# Altium PCB PCBInputPowerver2.PcbDoc
Units mm, origin at the board's own origin, x right, y up, seen from the top; angles counter-clockwise.
Board outline 75 x 90 mm, 2 copper layers (Top Layer, Bottom Layer), stack 1.671 mm thick; 51 components, 58 nets, 142 pads, 0 vias.
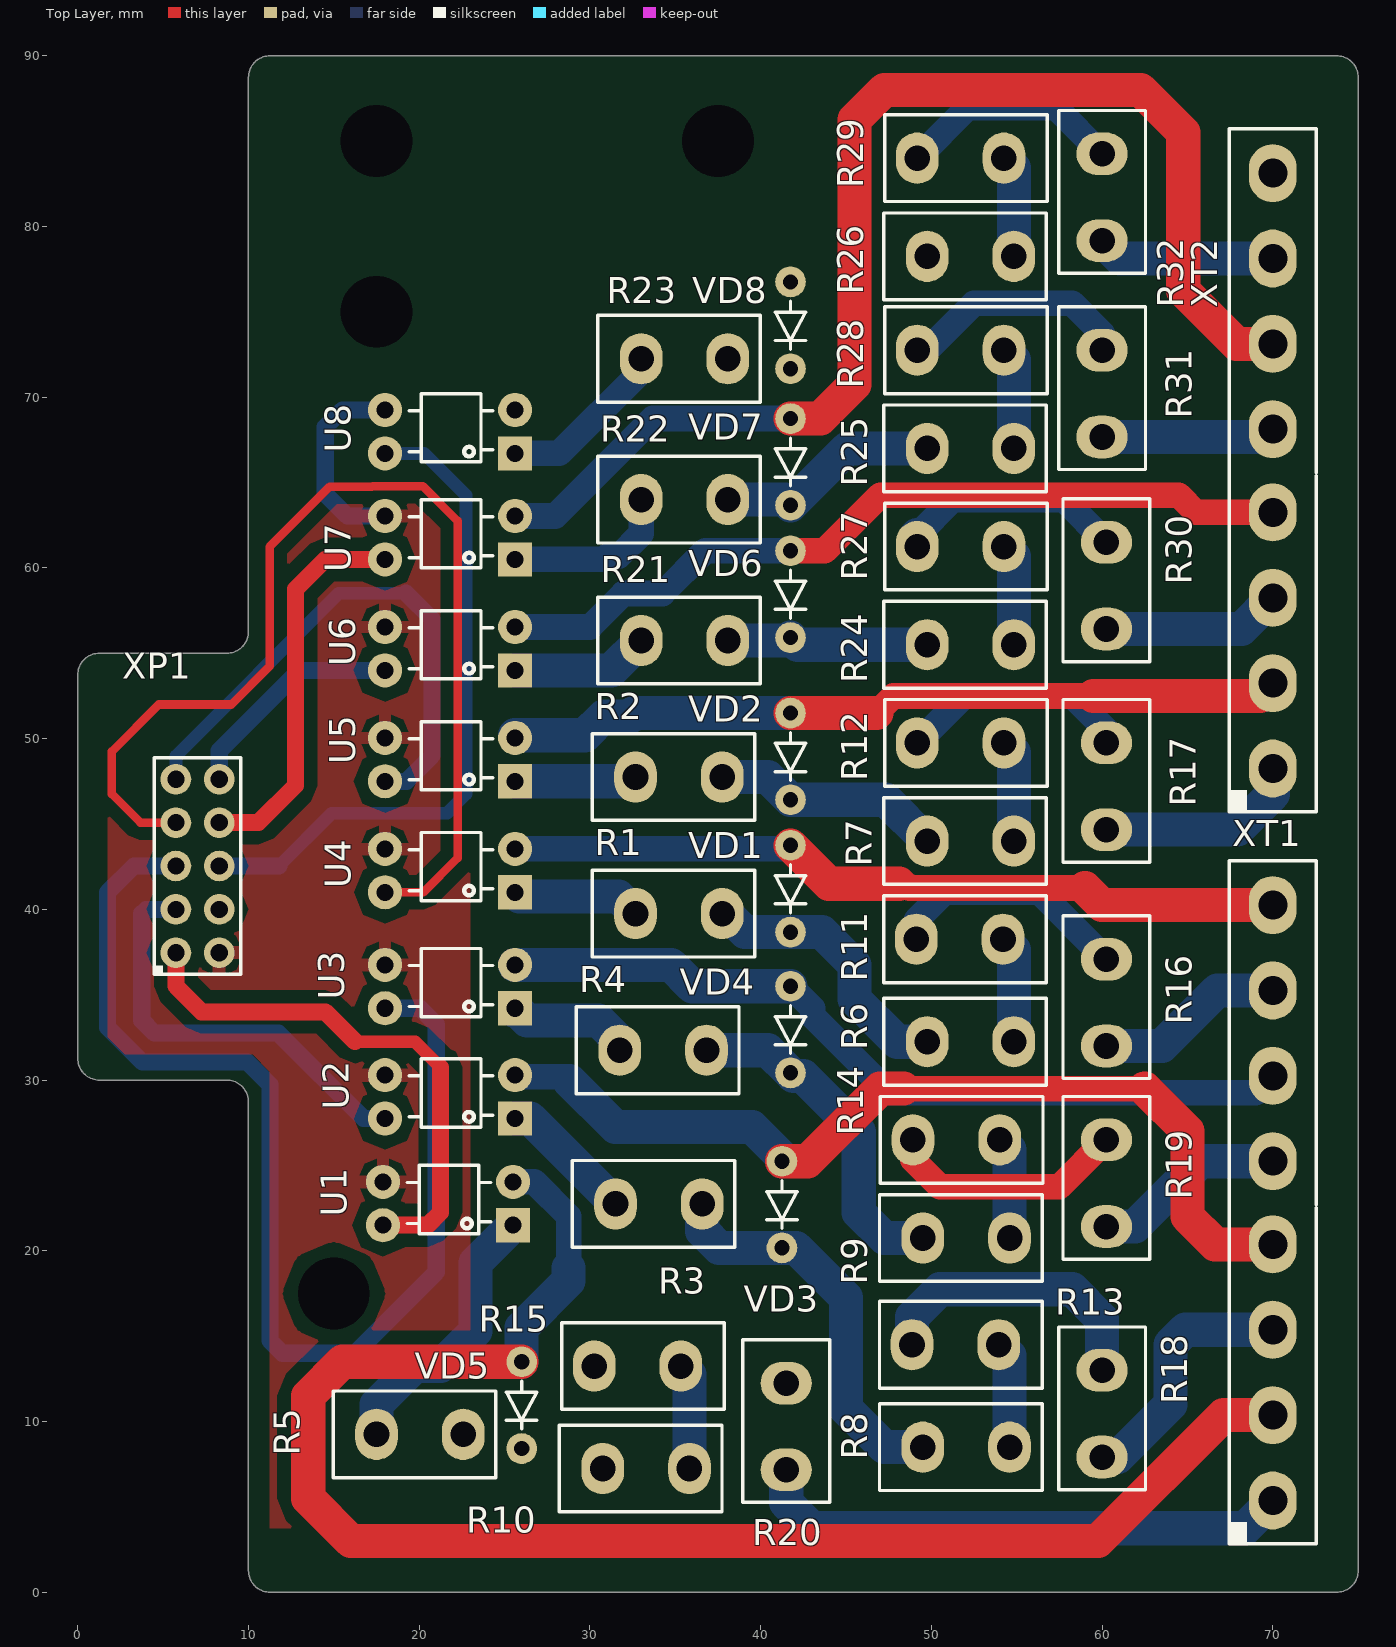
[diagram p0: Top Layer view]
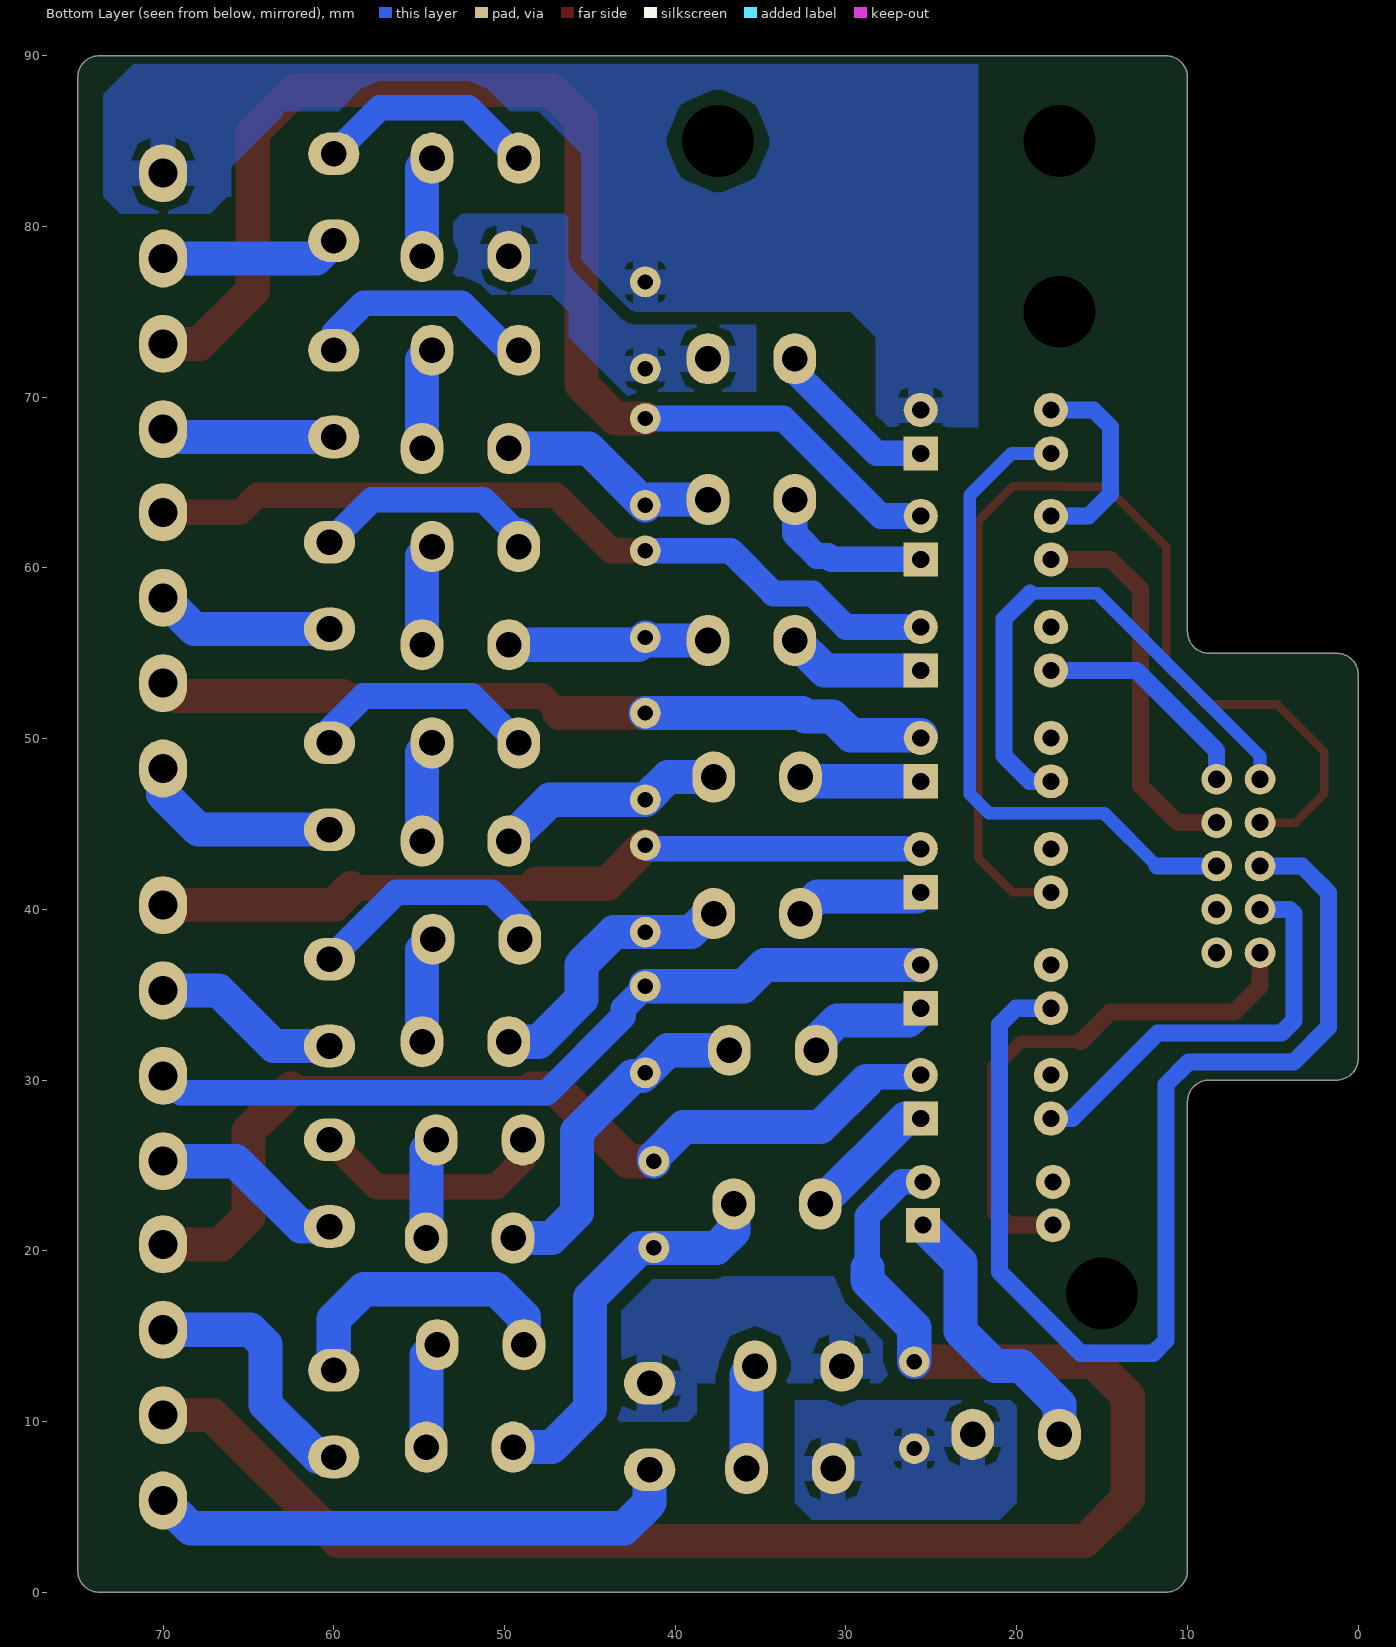
[diagram p1: Bottom Layer view, seen from below]

## Layer stack, top to bottom
Top Solder: solder mask 0.0102, Solder Resist, Dk 3.5
Top Layer: signal copper 0.0356
Dielectric 1: dielectric 1.6, FR-4, Dk 4.8
Bottom Layer: signal copper 0.0356
Bottom Solder: solder mask 0.0102, Solder Resist, Dk 3.5

## Board outline
2.5,30 8.73,30 cw(c8.73,28.73) 10,28.73 10,1.27 ccw(c11.27,1.27) 11.27,0 73.73,0 ccw(c73.73,1.27) 75,1.27 75,88.73 ccw(c73.73,88.73) 73.73,90 11.27,90 ccw(c11.27,88.73) 10,88.73 10,56.27 cw(c8.73,56.27) 8.73,55 1.27,55 ccw(c1.27,53.73) 0,53.73 0,31.27 ccw(c1.27,31.27) 1.27,30

## Design rules (kind name [scope] priority, off if disabled: settings)
Clearance [All] p1: gap=0.7 ignorepadtopadclearanceinfootprint=FALSE except(0.5: Arc-THPad Track-THPad SMDPad-THPad THPad-THPad)
PlaneClearance PlaneClearance_1 [InNetClass('Power')] p1: clearance=2
PlaneClearance [InNetClass('control_circuit')] p2: clearance=0.7
PlaneConnect PlaneConnect_1 [InNetClass('Power')] p1: planeconnectstyle=Relief reliefexpansion=0.8 reliefentries=4 reliefconductorwidth=1 reliefairgap=0.5
PlaneConnect [InNetClass('control_circuit')] p2: planeconnectstyle=Relief reliefexpansion=0.5 reliefentries=4 reliefconductorwidth=0.6 reliefairgap=0.4
PolygonConnect PolygonConnect_1 [InNetClass('Power')] p1: connectstyle=Relief reliefconductorwidth=1.5 reliefentries=4 polygonreliefangle="90 Angle" airgapwidth=0.5
PolygonConnect [InNetClass('control_circuit')] p2: connectstyle=Relief reliefconductorwidth=0.75 reliefentries=4 polygonreliefangle="90 Angle" airgapwidth=0.4
RoutingVias [All] p1: holewidth=0.8 width=1.6 viastyle="Through Hole" minholewidth=0.8 minwidth=1.6 maxholewidth=0.8 maxwidth=1.6
SolderMaskExpansion [All] p1: expansion=0.102
Width Width_1 [InNetClass('Power')] p1: maxlimit=3 minlimit=1.5 preferedwidth=2
Width [InNetClass('control_circuit')] p2: maxlimit=2 minlimit=0.4 preferedwidth=1
28 further rules are at their usual default settings.

## Classes and differential pairs
net class Power: NetR1_1 NetR1_2 NetR2_1 NetR2_2 NetR3_1 NetR3_2 NetR4_1 NetR4_2 NetR5_1 NetR5_2 NetR6_2 NetR7_2 NetR8_2 NetR9_2 NetR10_2 NetR11_2 NetR12_2 NetR13_2 NetR14_2 NetR15_2 NetR21_1 NetR21_2 NetR22_1 NetR22_2 NetR23_1 NetR23_2 NetR24_2 NetR25_2 NetR26_2 NetR27_2 NetR28_2 NetR29_2 SW1_1 SW1_2 SW2_1 SW2_2 SW3_1 SW3_2 SW4_1 SW4_2 SW5_1 SW5_2 SW6_1 SW6_2 SW7_1 SW7_2 SW8_1 SW8_2
net class control_circuit: GND INPUT1 INPUT2 INPUT3 INPUT4 INPUT5 INPUT6 INPUT7 INPUT8 VCC

## Components (designator, comment, footprint, x,y, rotation, side; value= is the part's Value field where it differs from the comment)
R1 "CFR02WJ0151P5" MOF-2W-15x5 32.67,39.75 r0 top value=150
R2 "CFR02WJ0151P5" MOF-2W-15x5 32.67,47.75 r0 top value=150
R3 "CFR02WJ0151P5" MOF-2W-15x5 31.5,22.75 r0 top value=150
R4 "CFR02WJ0151P5" MOF-2W-15x5 31.75,31.75 r0 top value=150
R5 "CFR02WJ0151P5" MOF-2W-15x5 17.5,9.25 r0 top value=150
R6 "CFR02WJ0512P5" MOF-2W-15x5 49.75,32.25 r0 top value=5k1
R7 "CFR02WJ0512P5" MOF-2W-15x5 49.75,44 r0 top value=5k1
R8 "CFR02WJ0512P5" MOF-2W-15x5 49.5,8.5 r0 top value=5k1
R9 "CFR02WJ0512P5" MOF-2W-15x5 49.5,20.75 r0 top value=5k1
R10 "CFR02WJ0512P5" MOF-2W-15x5 30.75,7.25 r0 top value=5k1
R11 "CFR02WJ0512P5" MOF-2W-15x5 54.195,38.25 r180 top value=5k1
R12 "CFR02WJ0512P5" MOF-2W-15x5 54.25,49.75 r180 top value=5k1
R13 "CFR02WJ0512P5" MOF-2W-15x5 53.945,14.5 r180 top value=5k1
R14 "CFR02WJ0512P5" MOF-2W-15x5 54,26.5 r180 top value=5k1
R15 "CFR02WJ0512P5" MOF-2W-15x5 35.33,13.25 r180 top value=5k1
R16 "CFR02WJ0512P5" MOF-2W-15x5 60.25,37.08 r270 top value=5k1
R17 "CFR02WJ0512P5" MOF-2W-15x5 60.25,49.75 r270 top value=5k1
R18 "CFR02WJ0512P5" MOF-2W-15x5 60,13 r270 top value=5k1
R19 "CFR02WJ0512P5" MOF-2W-15x5 60.25,26.5 r270 top value=5k1
R20 "CFR02WJ0512P5" MOF-2W-15x5 41.5,12.25 r270 top value=5k1
R21 "CFR02WJ0151P5" MOF-2W-15x5 33,55.75 r0 top value=150
R22 "CFR02WJ0151P5" MOF-2W-15x5 33,64 r0 top value=150
R23 "CFR02WJ0151P5" MOF-2W-15x5 33,72.25 r0 top value=150
R24 "CFR02WJ0512P5" MOF-2W-15x5 49.75,55.5 r0 top value=5k1
R25 "CFR02WJ0512P5" MOF-2W-15x5 49.75,67 r0 top value=5k1
R26 "CFR02WJ0512P5" MOF-2W-15x5 49.75,78.25 r0 top value=5k1
R27 "CFR02WJ0512P5" MOF-2W-15x5 54.25,61.25 r180 top value=5k1
R28 "CFR02WJ0512P5" MOF-2W-15x5 54.25,72.75 r180 top value=5k1
R29 "CFR02WJ0512P5" MOF-2W-15x5 54.25,84 r180 top value=5k1
R30 "CFR02WJ0512P5" MOF-2W-15x5 60.25,61.5 r270 top value=5k1
R31 "CFR02WJ0512P5" MOF-2W-15x5 60,72.75 r270 top value=5k1
R32 "CFR02WJ0512P5" MOF-2W-15x5 60,84.25 r270 top value=5k1
U1 "PC817C" DIP-4M 25.5,21.5 r180 top
U2 "PC817C" DIP-4M 25.62,27.75 r180 top
U3 "PC817C" DIP-4M 25.62,34.21 r180 top
U4 "PC817C" DIP-4M 25.62,41 r180 top
U5 "PC817C" DIP-4M 25.62,47.5 r180 top
U6 "PC817C" DIP-4M 25.62,54 r180 top
U7 "PC817C" DIP-4M 25.62,60.5 r180 top
U8 "PC817C" DIP-4M 25.62,66.71 r180 top
VD1 "BZX55C3V3" DO-35 41.75,43.75 r270 top
VD2 "BZX55C3V3" DO-35 41.75,51.5 r270 top
VD3 "BZX55C3V3" DO-35 41.25,25.25 r270 top
VD4 "BZX55C3V3" DO-35 41.75,35.5 r270 top
VD5 "BZX55C3V3" DO-35 26,13.5 r270 top
VD6 "BZX55C3V3" DO-35 41.75,61 r270 top
VD7 "BZX55C3V3" DO-35 41.75,68.75 r270 top
VD8 "BZX55C3V3" DO-35 41.75,76.75 r270 top
XP1 "IDC BH-10" IDC-10-2 5.75,37.46 r90 top
XT1 "KLS2-EDGK-500-08P-4C" KLS2-EDR-500-8P 70,5.377 r90 top
XT2 "KLS2-EDGK-500-08P-4C" KLS2-EDR-500-8P 70,48.25 r90 top

## Footprints (in the part's own frame and the unit in brackets; to place one, negate y for a bottom-side part, rotate by r counter-clockwise, add the part's x,y. Pads: shape width x height; smd on the part's side, far side on the other; paste and mask are expansions set on the pad)
DIP-4M [mm]
  rect 2x2 hole 1: 1(0,0)
  round 2 hole 1: 2(0,-2.54) 3(7.62,-2.54) 4(7.62,0)
  silkscreen extent 1.3,-3.5 6.2,0.5, body extent -0.19,-4.04 7.81,1.5, height 4.31
DO-35 [mm]
  round 1.8 hole 0.9: 1(0,0) 2(5.08,0)
  silkscreen extent 1.14,-0.89 3.94,0.89, body extent -0.28,-0.9 5.35,0.9, height 1.82
IDC-10-2 [mm]
  round 1.8 hole 1: 1(0,0) 2(2.54,0) 3(5.08,0) 4(7.62,0) 5(10.16,0) 6(10.16,-2.54) 7(7.62,-2.54) 8(5.08,-2.54) 9(2.54,-2.54) 10(0,-2.54)
  silkscreen extent -1.27,-3.81 11.43,1.27, body extent -5.13,-6.22 15.27,3.13, height 10.25
KLS2-EDR-500-8P [mm]
  oval 3.4x2.8 hole 1.7: 1(0,0) 2(5,0) 3(10,0) 4(15,0) 5(19.873,0) 6(24.873,0) 7(29.873,0) 8(34.873,0)
  silkscreen extent -2.54,-2.54 37.46,2.54, body extent -2.41,-20.69 37.46,1.65, height 16.34
MOF-2W-15x5 [mm]
  oval 2.5x3 hole 1.5: 1(0,0) 2(5.08,0)
  silkscreen extent -2.54,-2.54 6.98,2.54, body extent -2.6,-2.6 5.4,2.6, height 23.6

## Part data
R1 R2 R3 R4 R5 R6 R7 R8 R9 R10 R11 R12 R13 R14 R15 R16 R17 R18 R19 R20 R21 R22 R23 R24 R25 R26 R27 R28 R29 R30 R31 R32: library part Resistor, Manufacturer="Royal Ohm", Package=AXELPackage, Power=2W, Price=0.05, Quntity=24
  R1 R2 R3 R4 R5 R21 R22 R23: Part Number=CFR02WJ0151P5, ShoppingPlace=http://belchip.by/product/?selected_product=08041
  R6 R7 R8 R9 R10 R11 R12 R13 R14 R15 R16 R17 R18 R19 R20 R24 R25 R26 R27 R28 R29 R30 R31 R32: Part Number=CFR02WJ0512P5, ShoppingPlace=http://belchip.by/product/?selected_product=05907
U1 U2 U3 U4 U5 U6 U7 U8: library part PC817, Manufacturer=SHARP, Package=DIP-4, Part Number=PC817C, Price=0.15, Quantity=8, ShoppingPlace=http://belchip.by/product/?selected_product=29779
VD1 VD2 VD3 VD4 VD5 VD6 VD7 VD8: library part Stabilitron, Manufacturer="DC Components", Package=DO-35, Part Number=BZX55C3V3, Price=0.025, Quantity=16, ShoppingPlace=http://belchip.by/product/?selected_product=01814
XP1: library part "Разъем IDC BH-10", Manufacturer=RUICHI, Part Number="IDC BH-10", Price=0.22, Quantity=1, ShoppingPlace=http://belchip.by/product/?selected_product=01919
XT1 XT2: Manufacturer=KLS, Part Number=KLS2-EDGK-500-08P-4C, Price=0.55, Quantity=2, ShoppingPlace=http://belchip.by/product/?selected_product=19113

## Free pads (board coordinates)
  round 0 hole 4.2: 0(15,17.5) 0(17.5,75) 0(17.5,85) 0(37.5,85)

## Nets (pads, with @x,y where several pads share a name; then routed paths per layer and width w, separated by ;. In a path a pad name is that pad's centre, name@x,y a point inside that pad or via, vN(x,y) a via of type N, cw(c..) or ccw(c..) an arc to the next point about the centre after c; other vN are vias at no path point)
GND: U1.3 U2.3 U3.3 U4.3 U5.3 U6.3 U7.3 U8.3 XP1.10 | length 11.9
  Bottom Layer w1: U7.3 15.79,63.04 14.5,64.33 14.5,68.25 15.5,69.25 U8.3
INPUT1: U1.4 XP1.1 | length 31.6
  Top Layer w0.75: 16.25,32.25 19.75,32.25 21.25,30.75
  Top Layer w1: XP1.1 5.75,35.5 7.25,34 14.5,34 16.25,32.25 ; U1.4 20.5,21.5 21.25,22.25 21.25,30.75
INPUT2: U2.4 XP1.2 | length 25
  Bottom Layer w1: XP1.2 4,40 3.75,39.75 3.75,33.5 4.5,32.75 11.75,32.75 16.75,27.75 U2.4
INPUT3: U3.4 XP1.3 | length 68.4
  Bottom Layer w1: XP1.3 3.29,42.54 1.75,41 1.75,33.096 3.796,31.05 9.95,31.05 11.25,29.75 11.25,14.75 12,14 16.25,14 21,18.75 21,33.25 20.04,34.21 U3.4
INPUT4: U4.4 XP1.4 | length 63.4
  Top Layer w0.5: XP1.4 3.67,45.08 2,46.75 2,49.25 4.75,52 9,52 11.25,54.25 11.25,61.25 14.75,64.75 17.235,64.75 17.275,64.79 20.21,64.79 22.25,62.75 22.25,43 20.25,41 U4.4
INPUT5: U5.4 XP1.5 | length 32.3
  Bottom Layer w0.75: XP1.5 5.75,48.977 15.293,58.52 19.23,58.52
  Bottom Layer w1: U5.4 19.25,47.5 20.75,49 20.75,57 19.23,58.52
INPUT6: U6.4 XP1.6 | length 13.3
  Bottom Layer w1: XP1.6 8.29,49.29 13,54 U6.4
INPUT7: U7.4 XP1.7 | length 22.8
  Top Layer w1: XP1.7 10.58,45.08 12.75,47.25 12.75,58.75 14.5,60.5 U7.4
INPUT8: U8.4 XP1.8 | length 39.5
  Bottom Layer w0.75: 11.79,42.54 14.875,45.625 21.625,45.625 22.75,46.75 22.75,64.25 20.29,66.71 U8.4
  Bottom Layer w1: XP1.8 11.79,42.54
NetR1_1: R1.1 U4.1 | length 7.6
  Bottom Layer w2: U4.1 25.87,40.75 31.67,40.75 R1.1
NetR1_2: R1.2 R6.1 VD1.2 | length 16.3
  Bottom Layer w2: R1.2 38,39.75 39.08,38.67 VD1.2 43.58,38.67 45.5,36.75 45.5,34.75 48,32.25 R6.1
NetR2_1: R2.1 U5.1 | length 7.2
  Bottom Layer w2: U5.1 32.42,47.5 R2.1
NetR2_2: R2.2 R7.1 VD2.2 | length 13.6
  Bottom Layer w2: R2.2 40.42,47.75 VD2.2 47.33,46.42 R7.1
NetR3_1: R3.1 U2.1 | length 8
  Bottom Layer w2: U2.1 26.5,27.75 R3.1
NetR3_2: R3.2 R8.1 VD3.2 | length 23.6
  Bottom Layer w2: R3.2 36.58,21.17 37.58,20.17 VD3.2 42.08,20.17 45,17.25 45,10.75 47.25,8.5 R8.1
NetR4_1: R4.1 U3.1 | length 7.4
  Bottom Layer w2: U3.1@25.62,34.05 25.78,34.05 26.33,33.5 30.5,33.5 31.75,32.25 R4.1
NetR4_2: R4.2 R9.1 VD4.2 | length 20
  Bottom Layer w2: R4.2 40.42,31.75 VD4.2 41.94,30.23 42.494,30.23 45.75,26.974 45.75,22.25 47.25,20.75 R9.1
NetR5_1: R5.1 U1.1 | length 16.4
  Bottom Layer w2: R5.1 17.5,11 19.75,13.25 21.25,13.25 23.3,15.3 23.3,19.3 U1.1
NetR5_2: R5.2 R10.1 VD5.2
NetR6_2: R6.2 R11.1 | length 6.3
  Bottom Layer w2: R11.1 54.83,37.615 R6.2
NetR7_2: R7.2 R12.1 | length 6
  Bottom Layer w2: R12.1 54.83,49.17 R7.2
NetR8_2: R8.2 R13.1 | length 6.3
  Bottom Layer w2: R13.1 54.58,13.865 R8.2
NetR9_2: R9.2 R14.1 | length 6
  Bottom Layer w2: R14.1 54.58,25.92 R9.2
NetR10_2: R10.2 R15.1 | length 6.2
  Bottom Layer w2: R15.1 35.83,12.75 R10.2
NetR11_2: R11.2 R16.1 | length 14.6
  Bottom Layer w1.5: R11.2 49.115,39.365 50.75,41 56.33,41 R16.1
NetR12_2: R12.2 R17.1 | length 13.8
  Bottom Layer w1.5: R12.2 51.92,52.5 58.25,52.5 60.25,50.5 R17.1
NetR13_2: R13.2 R18.1 | length 17.2
  Bottom Layer w2: R13.2 48.865,16.115 50.5,17.75 58.25,17.75 60,16 R18.1
NetR14_2: R14.2 R19.1 | length 14.3
  Top Layer w1.5: R14.2 48.92,25.33 50.5,23.75 57.5,23.75 R19.1
NetR15_2: R15.2 R20.1
NetR21_1: R21.1 U6.1 | length 8.1
  Bottom Layer w2: U6.1 31.25,54 R21.1
NetR21_2: R21.2 R24.1 VD6.2 | length 11.9
  Bottom Layer w2: R21.2 41.58,55.75 VD6.2 42.17,55.5 R24.1
NetR22_1: R22.1 U7.1 | length 10
  Bottom Layer w1.5: U7.1 30.853,60.5 31.053,60.7 31.7,60.7 33,62 R22.1
NetR22_2: R22.2 R25.1 VD7.2 | length 13.2
  Bottom Layer w2: R22.2 41.42,64 VD7.2 45.08,67 R25.1
NetR23_1: R23.1 U8.1 | length 10.1
  Bottom Layer w1.5: U8.1 28.21,66.71 33,71.5 R23.1
NetR23_2: R23.2 R26.1 VD8.2
NetR24_2: R24.2 R27.1 | length 6
  Bottom Layer w2: R27.1 54.83,60.67 R24.2
NetR25_2: R25.2 R28.1 | length 6
  Bottom Layer w2: R28.1 54.83,72.17 R25.2
NetR26_2: R26.2 R29.1 | length 6
  Bottom Layer w2: R29.1 54.83,83.42 R26.2
NetR27_2: R27.2 R30.1 | length 13.6
  Bottom Layer w1.5: R27.2@49.17,61.92 51.25,64 57.75,64 R30.1
  Bottom Layer w2: R27.2 R27.2@49.17,61.92
NetR28_2: R28.2 R31.1 | length 13.7
  Bottom Layer w1.5: R28.2 49.75,72.75 52.5,75.5 58.25,75.5 60,73.75 R31.1
NetR29_2: R29.2 R32.1 | length 13.2
  Bottom Layer w1.5: R29.2 52.12,86.95 57.3,86.95 R32.1
SW1_1: R20.2 XT1.1 | length 31.7
  Bottom Layer w2: R20.2 41.5,5.25 43,3.75 68.373,3.75 XT1.1
SW1_2: U1.2 VD5.1 XT1.2 | length 93.7
  Top Layer w2: VD5.1 15.5,13.5 13.5,11.5 13.5,5.5 16,3 59.75,3 67.127,10.377 XT1.2
  Bottom Layer w1.5: U1.2 26.745,24.04 28.75,22.035 28.75,19
  Bottom Layer w2: VD5.1 26,15.5 28.75,18.25 28.75,19
SW2_1: R18.2 XT1.3 | length 15.1
  Bottom Layer w2: R18.2 60.92,7.92 64,11 64,14.5 64.877,15.377 XT1.3
SW2_2: U2.2 VD3.1 XT1.4 | length 55
  Top Layer w1.5: 48.361,29.5 62.5,29.5
  Top Layer w2: VD3.1 42.75,25.25 47,29.5 48.361,29.5 ; 62.5,29.5 65,27 65,22 66.623,20.377 XT1.4
  Bottom Layer w1.5: U2.2 25.71,30.2 28.816,30.2
  Bottom Layer w2: 28.816,29.934 31.5,27.25 39.5,27.25 41.25,25.5 VD3.1
SW3_1: R19.2 XT1.5 | length 11.3
  Bottom Layer w2: R19.2 61.92,21.42 65.75,25.25 XT1.5
SW3_2: U3.2 VD4.1 XT1.6 | length 48.2
  Bottom Layer w1.5: VD4.1 43.05,34.2 43.05,33.735 47.535,29.25 69,29.25 XT1.6
  Bottom Layer w2: U3.2 34.75,36.75 36,35.5 VD4.1
SW4_1: R16.2 XT1.7 | length 11.1
  Bottom Layer w2: R16.2 63.5,32 66.75,35.25 XT1.7
SW4_2: U4.2 VD1.1 XT1.8 | length 45.9
  Top Layer w1.5: 48.111,41.5 48.464,41.5 48.714,41.25 59,41.25
  Top Layer w2: VD1.1 44,41.5 48.111,41.5 ; 59,41.25 60,40.25 XT1.8
  Bottom Layer w1.5: U4.2 41.54,43.54 VD1.1
SW5_1: R17.2 XT2.1 | length 12.1
  Bottom Layer w2: R17.2 67.92,44.67 70,46.75 XT2.1
SW5_2: U5.2 VD2.1 XT2.2 | length 45.6
  Top Layer w1.5: 46.781,51.5 47.781,52.5 59.5,52.5
  Top Layer w2: VD2.1 46.781,51.5 ; 59.5,52.5 69.25,52.5 XT2.2
  Bottom Layer w2: U5.2@25.62,50.2 29.7,50.2 30.8,51.3 32.368,51.3 32.568,51.5 VD2.1
SW6_1: R30.2 XT2.3 | length 10.5
  Bottom Layer w2: R30.2 68.17,56.42 XT2.3
SW6_2: U6.2 VD6.1 XT2.4 | length 48
  Top Layer w1.5: VD6.1 43.75,61 47,64.25 64.5,64.25 65.5,63.25 XT2.4
  Bottom Layer w1.5: U6.2 30.004,56.54 31.964,58.5 34.25,58.5 36.75,61 VD6.1
SW7_1: R31.2 XT2.5 | length 10.2
  Bottom Layer w2: R31.2 69.547,67.67 XT2.5
SW7_2: U7.2 VD7.1 XT2.6 | length 75.4
  Top Layer w2: VD7.1 43.5,68.75 45.5,70.75 45.5,86.25 47.25,88 62.25,88 64.75,85.5 64.75,76.25 67.877,73.123 XT2.6
  Bottom Layer w1.5: U7.2 27.972,63.04 33.682,68.75 VD7.1
SW8_1: R32.2 XT2.7 | length 10.4
  Bottom Layer w2: R32.2 61.047,78.123 XT2.7
SW8_2: U8.2 VD8.1 XT2.8
VCC: XP1.9

## Polygon pours and split planes (outlines as drawn)
NetR15_2 on Bottom Layer "Top Overlay-No Net" (solid, remove dead copper, pour order 8): 28,12.25 27.5,12.75 27.5,15.25 30.75,18.5 41.25,18.5 43.75,16 43.75,10.5 43.25,10 39.25,10 38.75,10.5 38.75,12.25
NetR5_2 on Bottom Layer "Top Overlay-No Net" (solid, remove dead copper, pour order 6): 20,11.25 20,5.25 21,4.25 32,4.25 33,5.25 33,11.25
NetR23_2 on Bottom Layer "Top Overlay-No Net" (solid, remove dead copper, pour order 4): 35.25,70 42.75,70 46.25,73.5 46.25,75 47.25,76 51.75,76 53,77.25 53,80.25 52.5,80.75 46.5,80.75 46.25,80.5 46.25,78 42.5,74.25 35.25,74.25
SW8_2 on Bottom Layer "Top Overlay-No Net" (solid, remove dead copper, pour order 2): 22.25,68.25 27.5,68.25 28,68.75 28.25,68.75 28.25,73.5 29.75,75 42.5,75 45.5,78 45.5,84.25 48,86.75 63,86.75 63,86.5 66,83.5 66,81.75 66.25,81.75 67.25,80.75 72.5,80.75 73.5,81.75 73.5,87.75 71.75,89.5 22.25,89.5
GND on Top Layer "Top Overlay-No Net" (solid, remove dead copper, pour order 10): 11.25,3.75 20.25,3.75 23,6.5 23,63.5 19,67.5 11.25,67.5 11.25,53.5 9,51.25 4,51.25 4,51 1.75,48.75 1.75,32.5 2.75,31.5 10.25,31.5 11.25,30.5

## Silkscreen, mask and mechanical layers (free items; w line width, h text height)
Board:
  lines w0.2: 75,2.5 75,1.27 cw(c73.73,1.27) 73.73,0 12.5,0 11.27,0 cw(c11.27,1.27) 10,1.27 10,27.5 10,28.73 ccw(c8.73,28.73) 8.73,30 2.5,30 1.27,30 cw(c1.27,31.27) 0,31.27 0,32.5 0,53.73 cw(c1.27,53.73) 1.27,55 7.5,55 8.73,55 ccw(c8.73,56.27) 10,56.27 10,57.5 10,88.73 cw(c11.27,88.73) 11.27,90 73.73,90 cw(c73.73,88.73) 75,88.73 75,87.5
  lines w0.254: 75,2.5 75,87.5